# Altium PCB PCB_V1.PcbDoc
Units mm, origin at the board's own origin, x right, y up, seen from the top; angles counter-clockwise.
Board outline 76.58 x 99.4 mm, 2 copper layers (Top Layer, Bottom Layer), stack 0.08 mm thick; 14 components, 8 nets, 32 pads, 0 vias.
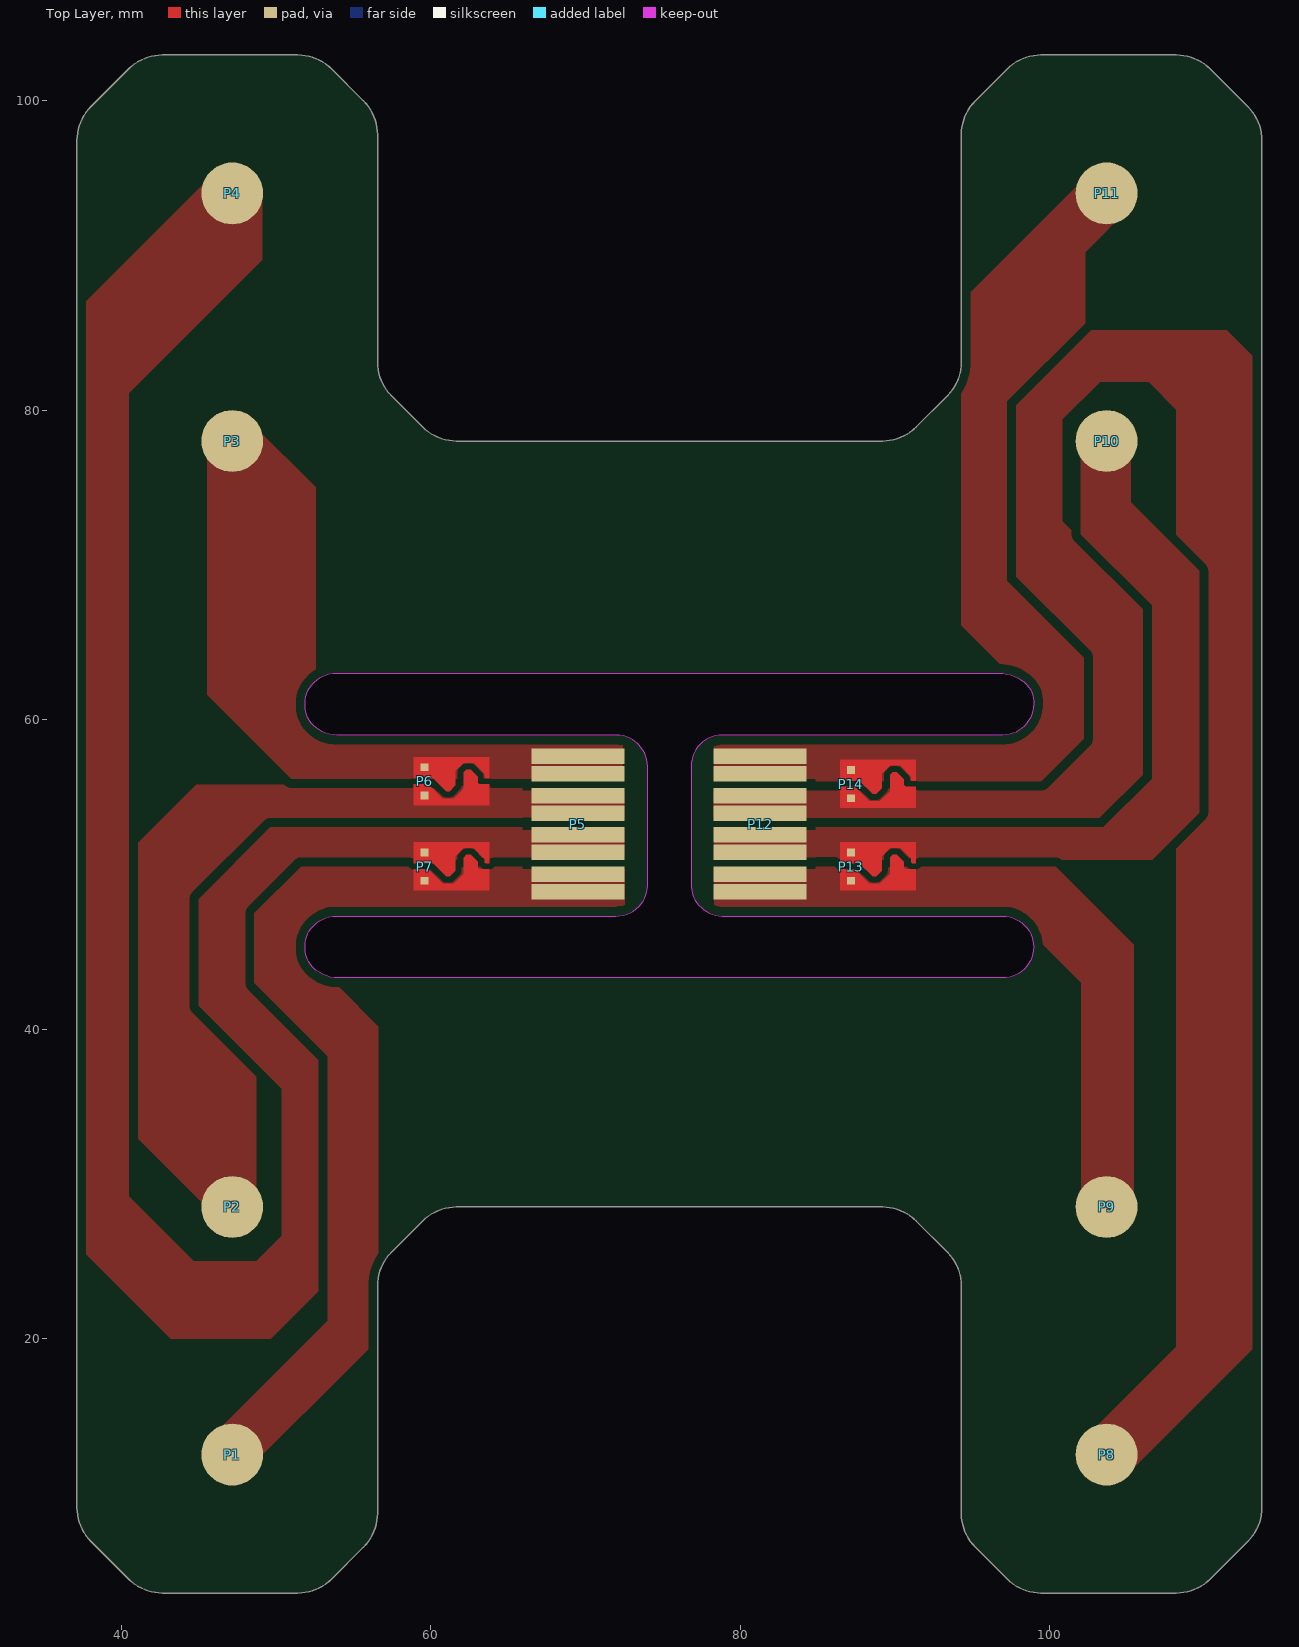
[diagram p0: Top Layer view]
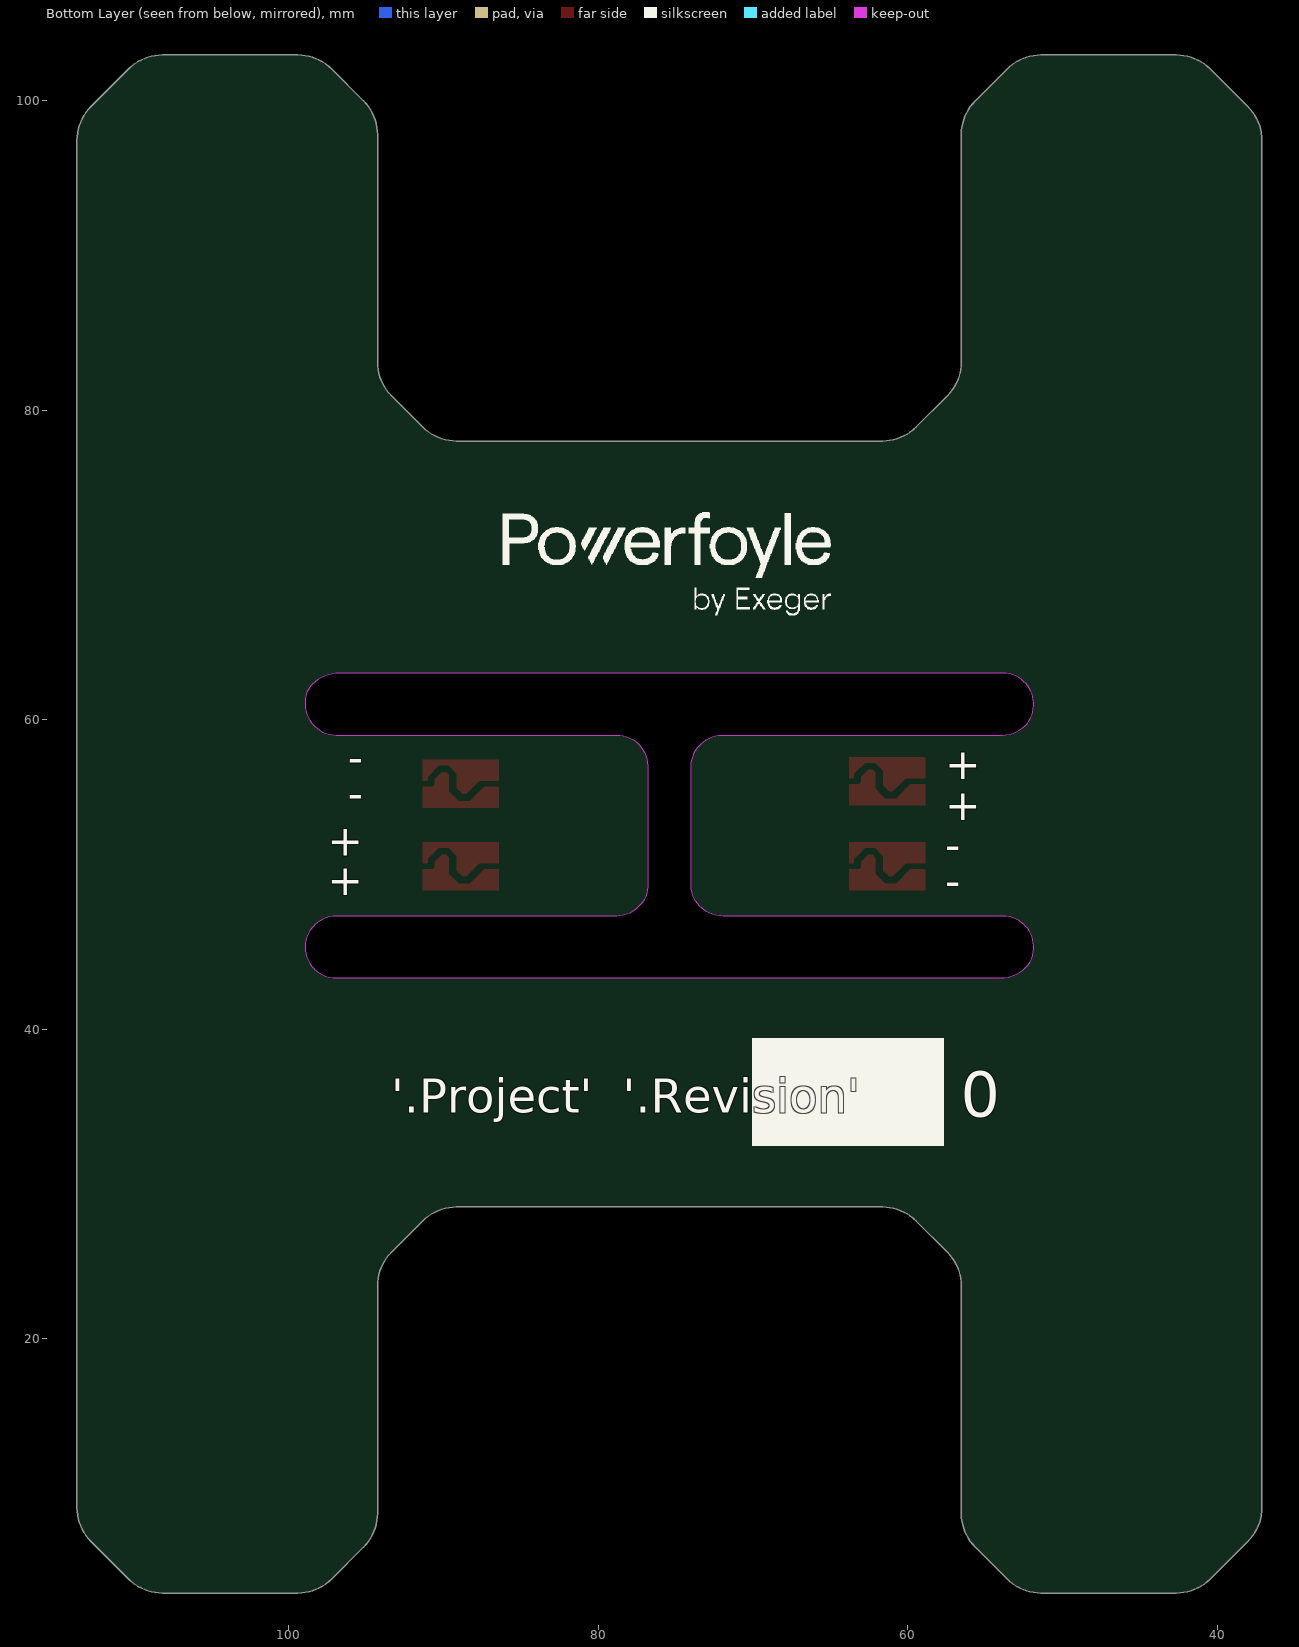
[diagram p1: Bottom Layer view, seen from below]

## Layer stack, top to bottom
Top Solder: solder mask 0.0102, Solder Resist, Dk 3.5
Top Layer: signal copper 0.035
Dielectric 1: dielectric 0.01, Kapton, Dk 4.8
Bottom Layer: signal copper 0.035
Bottom Solder: solder mask 0.0102, Solder Resist, Dk 3.5

## Board outline
40.479,4.448 ccw(c42.647,6.616) 42.647,3.55 51.405,3.55 ccw(c51.405,6.616) 53.573,4.448 55.652,6.527 ccw(c53.484,8.695) 56.55,8.695 56.55,23.405 cw(c59.616,23.405) 57.448,25.573 59.477,27.602 cw(c61.645,25.434) 61.645,28.5 89.183,28.5 cw(c89.183,25.434) 91.351,27.602 93.38,25.573 cw(c91.212,23.405) 94.278,23.405 94.278,8.695 ccw(c97.344,8.695) 95.176,6.527 97.255,4.448 ccw(c99.423,6.616) 99.423,3.55 108.181,3.55 ccw(c108.181,6.616) 110.349,4.448 112.805,6.904 ccw(c110.637,9.072) 113.703,9.072 113.703,97.428 ccw(c110.637,97.428) 112.805,99.596 110.349,102.052 ccw(c108.181,99.884) 108.181,102.95 99.423,102.95 ccw(c99.423,99.884) 97.255,102.052 95.176,99.973 ccw(c97.344,97.805) 94.278,97.805 94.278,83.095 cw(c91.212,83.095) 93.38,80.927 91.351,78.898 cw(c89.183,81.066) 89.183,78 61.645,78 cw(c61.645,81.066) 59.477,78.898 57.448,80.927 cw(c59.616,83.095) 56.55,83.095 56.55,97.805 ccw(c53.484,97.805) 55.652,99.973 53.573,102.052 ccw(c51.405,99.884) 51.405,102.95 42.647,102.95 ccw(c42.647,99.884) 40.479,102.052 38.023,99.596 ccw(c40.191,97.428) 37.125,97.428 37.125,9.072 ccw(c40.191,9.072) 38.023,6.904
cut-out: 75.414,62.989 96.728,62.989 cw(c96.728,60.466) 98.512,62.25 cw(c97.448,61.186) 98.953,61.186 98.953,60.998 cw(c96.973,60.998) 98.373,59.598 98.35,59.575 cw(c96.956,60.969) 96.956,58.998 78.843,58.998 ccw(c78.843,56.957) 77.4,58.4 ccw(c78.782,57.018) 76.828,57.018 76.828,49.201 ccw(c78.526,49.201) 77.325,48 77.458,47.867 ccw(c78.828,49.238) 78.828,47.3 96.969,47.3 cw(c96.969,45.377) 98.328,46.737 98.378,46.687 cw(c96.991,45.3) 98.953,45.3 cw(c96.953,45.3) 98.367,43.886 98.36,43.879 cw(c96.962,45.277) 96.962,43.3 54.021,43.3 cw(c54.021,45.634) 52.371,43.984 cw(c53.568,45.181) 51.875,45.181 51.875,45.376 cw(c53.685,45.376) 52.405,46.656 52.465,46.716 cw(c53.875,45.306) 53.875,47.3 71.941,47.3 ccw(c71.941,49.434) 73.45,47.925 ccw(c72.122,49.253) 74,49.253 74,56.987 ccw(c72.037,56.987) 73.425,58.375 73.37,58.43 ccw(c72,57.061) 72,58.998 53.915,58.998 cw(c53.915,61.14) 52.4,59.625 cw(c53.667,60.892) 51.875,60.892 51.875,61.074 cw(c53.671,61.074) 52.401,62.344 52.475,62.418 cw(c53.875,61.018) 53.875,62.998

## Design rules (kind name [scope] priority, off if disabled: settings)
BoardOutlineClearance [All] p1: gap=0.6 ignorepadtopadclearanceinfootprint=FALSE
Clearance "Clearance to footprint" [HasFootprint('Customer_2022_solder_short_ISOL_0.4_S') OR HasFootprint('Customer_2026_solder_short_ISOL_0.4') OR HasFootprint('EXEGER_IV_10_PIN_ISOL_0.4')] p1: gap=0.4 ignorepadtopadclearanceinfootprint=FALSE
Clearance "Clearance to cell connections" [HasFootprint('Cell_pad_4mm_SM0.5mm')] p2: gap=0.6 ignorepadtopadclearanceinfootprint=FALSE
Clearance [All] p3: gap=0.6 ignorepadtopadclearanceinfootprint=FALSE
DiffPairsRouting [All] p1: maxlimit=0.254 minlimit=0.254 mostfreqgap=0.254 substack1={AC398A8C-2EBD-4929-A576-1C4F7B57599D} toplayer_{ac398a8c-2ebd-4929-a576-1c4f7b57599d}_minwidth=0.381 toplayer_{ac398a8c-2ebd-4929-a576-1c4f7b57599d}_maxwidth=0.381 toplayer_{ac398a8c-2ebd-4929-a576-1c4f7b57599d}_prefwidth=0.381 bottomlayer_{ac398a8c-2ebd-4929-a576-1c4f7b57599d}_minwidth=0.381 bottomlayer_{ac398a8c-2ebd-4929-a576-1c4f7b57599d}_maxwidth=0.381 bottomlayer_{ac398a8c-2ebd-4929-a576-1c4f7b57599d}_prefwidth=0.381 substack2={C3FBE846-BD83-49AA-845B-1BEE8A776ADA} toplayer_{c3fbe846-bd83-49aa-845b-1bee8a776ada}_minwidth=0.381 toplayer_{c3fbe846-bd83-49aa-845b-1bee8a776ada}_maxwidth=0.381 toplayer_{c3fbe846-bd83-49aa-845b-1bee8a776ada}_prefwidth=0.381 bottomlayer_{c3fbe846-bd83-49aa-845b-1bee8a776ada}_minwidth=0.381 bottomlayer_{c3fbe846-bd83-49aa-845b-1bee8a776ada}_maxwidth=0.381 bottomlayer_{c3fbe846-bd83-49aa-845b-1bee8a776ada}_prefwidth=0.381 substack3={068A34C2-B61F-40AE-8550-B44704E20CBD} toplayer_{068a34c2-b61f-40ae-8550-b44704e20cbd}_minwidth=0.381 toplayer_{068a34c2-b61f-40ae-8550-b44704e20cbd}_maxwidth=0.381 toplayer_{068a34c2-b61f-40ae-8550-b44704e20cbd}_prefwidth=0.381 bottomlayer_{068a34c2-b61f-40ae-8550-b44704e20cbd}_minwidth=0.381 bottomlayer_{068a34c2-b61f-40ae-8550-b44704e20cbd}_maxwidth=0.381 bottomlayer_{068a34c2-b61f-40ae-8550-b44704e20cbd}_prefwidth=0.381 toplayer_minwidth=0.381 toplayer_maxwidth=0.381 toplayer_prefwidth=0.381 bottomlayer_minwidth=0.381 bottomlayer_maxwidth=0.381 bottomlayer_prefwidth=0.381 substack4={1DBF04A3-A739-4845-80F4-67AE6DF34821} toplayer_{1dbf04a3-a739-4845-80f4-67ae6df34821}_minwidth=0.381 toplayer_{1dbf04a3-a739-4845-80f4-67ae6df34821}_maxwidth=0.381 toplayer_{1dbf04a3-a739-4845-80f4-67ae6df34821}_prefwidth=0.381 bottomlayer_{1dbf04a3-a739-4845-80f4-67ae6df34821}_minwidth=0.381 bottomlayer_{1dbf04a3-a739-4845-80f4-67ae6df34821}_maxwidth=0.381 bottomlayer_{1dbf04a3-a739-4845-80f4-67ae6df34821}_prefwidth=0.381 substack5={706D0DFD-092C-4A59-9570-597311E816E1} toplayer_{706d0dfd-092c-4a59-9570-597311e816e1}_minwidth=0.381 toplayer_{706d0dfd-092c-4a59-9570-597311e816e1}_maxwidth=0.381 toplayer_{706d0dfd-092c-4a59-9570-597311e816e1}_prefwidth=0.381 bottomlayer_{706d0dfd-092c-4a59-9570-597311e816e1}_minwidth=0.381 bottomlayer_{706d0dfd-092c-4a59-9570-597311e816e1}_maxwidth=0.381 bottomlayer_{706d0dfd-092c-4a59-9570-597311e816e1}_prefwidth=0.381 substack6={F6441547-04AD-42D8-8F2E-114EB13474D3} toplayer_{f6441547-04ad-42d8-8f2e-114eb13474d3}_minwidth=0.381 toplayer_{f6441547-04ad-42d8-8f2e-114eb13474d3}_maxwidth=0.381 toplayer_{f6441547-04ad-42d8-8f2e-114eb13474d3}_prefwidth=0.381 bottomlayer_{f6441547-04ad-42d8-8f2e-114eb13474d3}_minwidth=0.381 bottomlayer_{f6441547-04ad-42d8-8f2e-114eb13474d3}_maxwidth=0.381 bottomlayer_{f6441547-04ad-42d8-8f2e-114eb13474d3}_prefwidth=0.381 substack7={D3D7B19F-2A18-4F5B-8A84-D7E783B0B577} toplayer_{d3d7b19f-2a18-4f5b-8a84-d7e783b0b577}_minwidth=0.381 toplayer_{d3d7b19f-2a18-4f5b-8a84-d7e783b0b577}_maxwidth=0.381 toplayer_{d3d7b19f-2a18-4f5b-8a84-d7e783b0b577}_prefwidth=0.381 bottomlayer_{d3d7b19f-2a18-4f5b-8a84-d7e783b0b577}_minwidth=0.381 bottomlayer_{d3d7b19f-2a18-4f5b-8a84-d7e783b0b577}_maxwidth=0.381 bottomlayer_{d3d7b19f-2a18-4f5b-8a84-d7e783b0b577}_prefwidth=0.381 substack8={33F0C8AE-5BAA-4F54-8420-C15B5188DF2B} toplayer_{33f0c8ae-5baa-4f54-8420-c15b5188df2b}_minwidth=0.381 toplayer_{33f0c8ae-5baa-4f54-8420-c15b5188df2b}_maxwidth=0.381 toplayer_{33f0c8ae-5baa-4f54-8420-c15b5188df2b}_prefwidth=0.381 bottomlayer_{33f0c8ae-5baa-4f54-8420-c15b5188df2b}_minwidth=0.381 bottomlayer_{33f0c8ae-5baa-4f54-8420-c15b5188df2b}_maxwidth=0.381 bottomlayer_{33f0c8ae-5baa-4f54-8420-c15b5188df2b}_prefwidth=0.381 substack9={5DEA7FFC-9C65-4E3C-AA6C-196D072506BA} toplayer_{5dea7ffc-9c65-4e3c-aa6c-196d072506ba}_minwidth=0.381 toplayer_{5dea7ffc-9c65-4e3c-aa6c-196d072506ba}_maxwidth=0.381 toplayer_{5dea7ffc-9c65-4e3c-aa6c-196d072506ba}_prefwidth=0.381 bottomlayer_{5dea7ffc-9c65-4e3c-aa6c-196d072506ba}_minwidth=0.381 bottomlayer_{5dea7ffc-9c65-4e3c-aa6c-196d072506ba}_maxwidth=0.381 bottomlayer_{5dea7ffc-9c65-4e3c-aa6c-196d072506ba}_prefwidth=0.381 maxuncoupledlength=12.7
PolygonConnect [All] p1: connectstyle=Direct reliefconductorwidth=0.254 reliefentries=4 polygonreliefangle="90 Angle" airgapwidth=0.254
RoutingVias [All] p1: holewidth=0.711 width=1.27 viastyle="Through Hole" minholewidth=0.711 minwidth=1.27 maxholewidth=0.711 maxwidth=1.27
SolderMaskExpansion [All] p1: expansion=0.102 istentingtop=FALSE
UnRoutedNet [All] p1: checkbadconnections=TRUE
Width [All] p1: maxlimit=10 minlimit=0.2 preferedwidth=2 substack1={AC398A8C-2EBD-4929-A576-1C4F7B57599D} substack2={C3FBE846-BD83-49AA-845B-1BEE8A776ADA} substack3={068A34C2-B61F-40AE-8550-B44704E20CBD} substack4={1DBF04A3-A739-4845-80F4-67AE6DF34821} substack5={706D0DFD-092C-4A59-9570-597311E816E1} substack6={F6441547-04AD-42D8-8F2E-114EB13474D3} substack7={D3D7B19F-2A18-4F5B-8A84-D7E783B0B577} substack8={33F0C8AE-5BAA-4F54-8420-C15B5188DF2B} substack9={5DEA7FFC-9C65-4E3C-AA6C-196D072506BA}
28 further rules are at their usual default settings.

## Components (designator, comment, footprint, x,y, rotation, side; value= is the part's Value field where it differs from the comment)
P1 "Cell connection" Cell_pad_4mm_SM0.5mm#1 47.164,12.5 r90 top
P2 "Cell connection" Cell_pad_4mm_SM0.5mm#1 47.164,28.5 r90 top
P3 "Cell connection" Cell_pad_4mm_SM0.5mm#1 47.164,78 r90 top
P4 "Cell connection" Cell_pad_4mm_SM0.5mm#1 47.164,94 r90 top
P5 "Exeger IV-test" EXEGER_IV_8_PIN_NO_STIFF_ISOL_0.4 69.498,57.694 r0 top
P6 "Customer conn, solder short" Customer_2022_solder_short_ISOL_0.4_S 60.886,56.188 r0 top
P7 "Customer conn, solder short" Customer_2022_solder_short_ISOL_0.4_S 60.886,50.685 r0 top
P8 "Cell connection" Cell_pad_4mm_SM0.5mm#1 103.664,12.5 r0 top
P9 "Cell connection" Cell_pad_4mm_SM0.5mm#1 103.664,28.5 r0 top
P10 "Cell connection" Cell_pad_4mm_SM0.5mm#1 103.664,78 r0 top
P11 "Cell connection" Cell_pad_4mm_SM0.5mm#2 103.664,94 r0 top
P12 "Exeger IV-test" EXEGER_IV_8_PIN_NO_STIFF_ISOL_0.4 81.275,48.804 r180 top
P13 "Customer conn, solder short" Customer_2022_solder_short_ISOL_0.4_S 88.444,50.69 r0 top
P14 "Customer conn, solder short" Customer_2022_solder_short_ISOL_0.4_S 88.444,56.017 r0 top

## Footprints (in the part's own frame and the unit in brackets; to place one, negate y for a bottom-side part, rotate by r counter-clockwise, add the part's x,y. Pads: shape width x height; smd on the part's side, far side on the other; paste and mask are expansions set on the pad)
Cell_pad_4mm_SM0.5mm#1 [mm]
  round 4 smd mask+0: 1(0,0)
Cell_pad_4mm_SM0.5mm#2 [mm]
  round 4 smd: 1(0,0)
Customer_2022_solder_short_ISOL_0.4_S [mm]
  rect 0.5x0.5 smd paste-2 mask+0: 1(-1.3,0.725) 2(-1.3,-1.1)
  Top Layer region: 0.7,0.488 1.237,1.025 1.875,1.025 2.6,0.3 2.6,0.075 2.65,0.025 2.9,0.025 2.9,1.375 0.7,1.375 -2,1.375 -2,0.4 -1.912,0.488
  Top Layer region: -2,-1.725 2.125,-1.725 2.125,0.125 1.675,0.575 1.4,0.575 1.225,0.4 1.225,-0.65 0.575,-1.3 -0.125,-1.3 -1.05,-0.375 -2,-0.375
  Top Layer region: 1.875,0 2.25,-0.375 2.9,-0.375 2.9,-1.721 2.125,-1.725 1.138,-0.737
  Top Layer region: -2,1.375 0.7,1.375 0.7,-0.45 0.325,-0.825 0.1,-0.825 -0.75,0.025 -2,0.025
EXEGER_IV_8_PIN_NO_STIFF_ISOL_0.4 [mm] "TE  4-487576-9 mating"
  rect 6x1 smd paste-2 mask+0.1: 1(0,-0.066) 2(0,-1.204) 3(0,-2.606) 4(0,-3.744) 5(0,-5.146) 6(0,-6.284) 7(0,-7.686) 8(0,-8.824)

## Part data
P1 P2 P3 P4 P8 P9 P10 P11: library part "Cell connection 1P"
P5 P12: library part "Header 8", "Header, 8-Pin"
P6 P7 P13 P14: library part "Header 2", "Header, 2-Pin"

## Nets (pads, with @x,y where several pads share a name; then routed paths per layer and width w, separated by ;. In a path a pad name is that pad's centre, name@x,y a point inside that pad or via, vN(x,y) a via of type N, cw(c..) or ccw(c..) an arc to the next point about the centre after c; other vN are vias at no path point)
N_1: P1.1 P5.7 P5.8 P7.2
N_2: P4.1 P5.5 P5.6 P7.1
N_3: P8.1 P12.5 P12.6 P14.2
N_4: P11.1 P12.7 P12.8 P14.1
P_1: P2.1 P5.3 P5.4 P6.2
P_2: P3.1 P5.1 P5.2 P6.1
P_3: P9.1 P12.1 P12.2 P13.2
P_4: P10.1 P12.3 P12.4 P13.1

## Polygon pours and split planes (outlines as drawn)
P_1 on Top Layer "NONET_L-01_P-001" (solid, pour order 12): 47.164,26.84 41.05,32.953 41.05,51.988 44.85,55.788 72.349,55.788 72.489,55.648 72.489,53.45 50.036,53.45 44.85,48.264 44.85,40.864 48.704,37.009 48.704,27.602
N_2 on Top Layer "NONET_L-01_P-001" (solid, pour order 11): 46.3,95.6 35.625,84.925 35.625,27.55 43.2,19.975 49.653,19.975 53.293,23.615 53.293,37.811 48.6,42.504 48.6,47.472 51.838,50.71 72.507,50.71 72.507,53.036 49.622,53.036 44.985,48.399 44.985,41.515 50.35,36.15 50.35,26.65 48.704,25.004 44.671,25.004 40.479,29.196 40.479,81.079 49.1,89.7 49.1,94
P_2 on Top Layer "NONET_L-01_P-001" (solid, pour order 10): 45.55,78.85 45.55,70.778 45.55,61.608 50.97,56.188 72.026,56.188 72.411,56.574 72.411,59.393 69.318,62.487 52.544,62.487 52.544,75.006 48.5,79.05
N_1 on Top Layer "NONET_L-01_P-001" (solid, pour order 9): 47.625,11 56.6,19.975 56.6,40.158 51.908,44.851 52.786,45.73 72.526,45.73 72.526,50.464 72.488,50.503 51.631,50.503 48.6,47.472 48.6,42.975 53.34,38.235 53.34,21.14 45.4,13.2
N_3 on Top Layer "N_3_L01_P008" (solid, pour order 8): 102.025,12.5 102.025,13.325 108.181,19.481 108.181,80.031 106.384,81.827 103.243,81.827 100.806,79.391 100.806,72.813 106.484,67.135 106.484,56.526 103.424,53.466 78.277,53.466 78.277,55.571 78.262,55.585 99.683,55.585 102.673,58.576 102.673,64.08 97.419,69.334 97.419,80.51 102.065,85.155 111.439,85.155 114.646,81.949 114.646,20.871 104.6,10.825 103.65,11.775 102.65,11.775
P_4 on Top Layer "P_4_L01_P007" (solid, pour order 7): 101.985,78.564 101.985,71.986 106.6,67.372 106.6,56.186 103.455,53.041 78.305,53.041 78.305,50.965 78.287,50.947 106.622,50.947 109.65,53.975 109.65,69.615 105.229,74.036 105.229,78.683
N_4 on Top Layer "N_4_L01_P006" (solid, pour order 6): 102.525,95.25 94.278,87.003 94.278,66.078 97.464,62.892 95.758,61.186 80.527,61.186 78.251,58.91 78.296,58.864 78.296,56.017 99.458,56.017 102.198,58.757 102.198,64.002 97.22,68.98 97.22,80.57 102.275,85.625 102.275,90.2 105.4,93.325
P_3 on Top Layer "P_3_L01_P005" (solid, pour order 5): 102.025,28.425 102.025,42.988 98.037,46.976 97.957,46.896 78.314,46.896 78.314,50.449 78.277,50.486 100.394,50.486 105.432,45.448 105.432,28.375 104.572,27.515 103.38,27.515
no net on PSA "NONET_L-01_P-001" (solid): 51.623,102.95 cw(c51.623,100.41) 53.419,102.206 55.806,99.819 cw(c54.01,98.023) 56.55,98.023 56.55,82.877 ccw(c59.09,82.877) 57.294,81.081 59.631,78.744 ccw(c61.427,80.54) 61.427,78 89.4,78 ccw(c89.4,80.54) 91.197,78.744 93.534,81.081 ccw(c91.738,82.877) 94.278,82.877 94.278,98.023 cw(c96.818,98.023) 95.022,99.819 97.409,102.206 cw(c99.205,100.41) 99.205,102.95 108.398,102.95 cw(c108.398,100.41) 110.195,102.206 112.959,99.442 cw(c111.163,97.646) 113.703,97.646 113.703,8.854 cw(c111.163,8.854) 112.959,7.058 110.195,4.294 cw(c108.398,6.09) 108.398,3.55 99.205,3.55 cw(c99.205,6.09) 97.409,4.294 95.022,6.681 cw(c96.818,8.477) 94.278,8.477 94.278,23.623 ccw(c91.738,23.623) 93.534,25.419 91.197,27.756 ccw(c89.4,25.96) 89.4,28.5 61.427,28.5 ccw(c61.427,25.96) 59.631,27.756 57.294,25.419 ccw(c59.09,23.623) 56.55,23.623 56.55,8.477 cw(c54.01,8.477) 55.806,6.681 53.419,4.294 cw(c51.623,6.09) 51.623,3.55 42.429,3.55 cw(c42.429,6.09) 40.633,4.294 37.869,7.058 cw(c39.665,8.854) 37.125,8.854 37.125,97.646 cw(c39.665,97.646) 37.869,99.442 40.633,102.206 cw(c42.429,100.41) 42.429,102.95

## Silkscreen, mask and mechanical layers (free items; w line width, h text height)
Bottom Overlay:
  drawing of 21 lines, arcs and shapes, not listed
  text "-" at 95.2,58.072 h2 r180
  text "+" at 57.583,56.135 h2
  text "-" at 95.2,55.747 h2 r180
  text "+" at 57.583,53.495 h2
  text "+" at 95.2,52.897 h2 r180
  text "-" at 57.583,50.91 h2
  text "+" at 95.2,50.347 h2 r180
  text "-" at 57.583,48.585 h2
  text "'.Project'  '.Revision'" at 93.38,34.6 h2.2
  text "0" at 56.6,33.35 h5
Cell drawing:
  circle w0.013: c103.664,94 r6
  circle w0.013: c47.164,78 r6
  circle w0.013: c47.164,28.5 r6
  circle w0.013: c103.664,28.5 r6
  circle w0.013: c103.664,78 r6
  circle w0.013: c103.664,12.5 r6
  circle w0.013: c47.164,12.5 r6
  circle w0.013: c47.164,94 r6
  circle w0.013: c103.664,94 r6.5
  circle w0.013: c103.664,12.5 r6.5
  circle w0.013: c47.164,94 r6.5
  circle w0.013: c47.164,12.5 r6.5
  circle w0.013: c103.664,94 r7.5
  circle w0.013: c103.664,12.5 r7.5
  circle w0.013: c47.164,94 r7.5
  circle w0.013: c47.164,12.5 r7.5
  lines w0.013: 18.914,-11.25 ccw(c19.914,-11.25) 19.914,-12.25 130.914,-12.25 ccw(c130.914,-11.25) 131.914,-11.25 131.914,117.75 ccw(c130.914,117.75) 130.914,118.75 19.914,118.75 ccw(c19.914,117.75) 18.914,117.75 18.914,-11.25
  lines w0.1: 9.1,118.75 24.75,118.75 ; 13.625,53.25 66.414,53.25 97.6,53.25 145.35,53.25 ; 16.375,-12.25 21.975,-12.25 ; 18.914,-16.85 18.914,-1.85 ; 18.914,115.725 18.914,122.961 ; 46.266,126.334 cw(c44.098,124.166) 47.164,124.166 47.164,94 ; 74,44.4 74,57.4 75.414,57.4 ; 75.414,-20.986 75.414,38.439 75.414,62.25 75.414,132.786 ; 75.414,53.25 75.414,57.4 ; 76.828,45 76.828,57.4 75.414,57.4 ; 127.125,118.75 132.925,118.75 ; 127.725,-12.25 135.9,-12.25 ; 131.914,-20.55 131.914,3.275 ; 131.914,114.975 131.914,122.514
Mech notes:
  rectangle: 203.1,7.25 230.1,17.75
PSA:
  pour cut-out: 99.27,94.247 99.27,96.325 cw(c101.81,96.325) 101.81,98.865 105.485,98.865 cw(c105.485,96.325) 108.025,96.325 108.025,91.626 cw(c105.485,91.626) 105.485,89.086 101.807,89.086 cw(c101.807,91.626) 99.267,91.626 99.267,94.247
  pour cut-out: 99.27,78.247 99.27,80.325 cw(c101.81,80.325) 101.81,82.865 105.485,82.865 cw(c105.485,80.325) 108.025,80.325 108.025,75.626 cw(c105.485,75.626) 105.485,73.086 101.807,73.086 cw(c101.807,75.626) 99.267,75.626 99.267,78.247
  pour cut-out: 99.27,28.747 99.27,30.825 cw(c101.81,30.825) 101.81,33.365 105.485,33.365 cw(c105.485,30.825) 108.025,30.825 108.025,26.126 cw(c105.485,26.126) 105.485,23.586 101.807,23.586 cw(c101.807,26.126) 99.267,26.126 99.267,28.747
  pour cut-out: 99.27,12.747 99.27,14.825 cw(c101.81,14.825) 101.81,17.365 105.485,17.365 cw(c105.485,14.825) 108.025,14.825 108.025,10.126 cw(c105.485,10.126) 105.485,7.586 101.807,7.586 cw(c101.807,10.126) 99.267,10.126 99.267,12.747
  pour cut-out: 42.77,12.747 42.77,14.825 cw(c45.31,14.825) 45.31,17.365 48.985,17.365 cw(c48.985,14.825) 51.525,14.825 51.525,10.126 cw(c48.985,10.126) 48.985,7.586 45.307,7.586 cw(c45.307,10.126) 42.767,10.126 42.767,12.747
  pour cut-out: 42.77,28.747 42.77,30.825 cw(c45.31,30.825) 45.31,33.365 48.985,33.365 cw(c48.985,30.825) 51.525,30.825 51.525,26.126 cw(c48.985,26.126) 48.985,23.586 45.307,23.586 cw(c45.307,26.126) 42.767,26.126 42.767,28.747
  pour cut-out: 42.77,78.247 42.77,80.325 cw(c45.31,80.325) 45.31,82.865 48.985,82.865 cw(c48.985,80.325) 51.525,80.325 51.525,75.626 cw(c48.985,75.626) 48.985,73.086 45.307,73.086 cw(c45.307,75.626) 42.767,75.626 42.767,78.247
  pour cut-out: 42.77,94.247 42.77,96.325 cw(c45.31,96.325) 45.31,98.865 48.985,98.865 cw(c48.985,96.325) 51.525,96.325 51.525,91.626 cw(c48.985,91.626) 48.985,89.086 45.307,89.086 cw(c45.307,91.626) 42.767,91.626 42.767,94.247
  pour cut-out: 98.953,60.9 98.953,45.103 51.875,45.103 51.875,60.998
Board Outline:
  lines w0.1: 74,50.125 74,56.375 ; 76.828,50.125 76.828,56.375
  lines w0.2: 53.875,43.3 cw(c53.875,45.3) 51.875,45.3 cw(c53.875,45.3) 53.875,47.3 67,47.3 72,47.3 ccw(c72,49.3) 74,49.3 74,50.125 74,56.375 74,56.998 ccw(c72,56.998) 72,58.998 67,58.998 53.875,58.998 cw(c53.875,60.998) 51.875,60.998 cw(c53.875,60.998) 53.875,62.998 ; 53.875,43.309 67,43.309 72,43.309 ; 53.875,62.989 67,62.989 72,62.989 78.828,62.989 83.828,62.989 96.953,62.989 ; 72,43.3 78.828,43.3 83.828,43.3 96.953,43.3 ccw(c96.953,45.3) 98.953,45.3 ccw(c96.953,45.3) 96.953,47.3 ; 78.828,47.291 83.828,47.291 96.953,47.291 ; 78.828,47.3 cw(c78.828,49.3) 76.828,49.3 76.828,50.125 76.828,56.375 76.828,56.998 cw(c78.828,56.998) 78.828,58.998 83.828,58.998 96.953,58.998 ccw(c96.953,60.998) 98.953,60.998 ccw(c96.953,60.998) 96.953,62.998 ; 37.125,9.072 ccw(c40.191,9.072) 38.023,6.904 40.479,4.448 ccw(c42.647,6.616) 42.647,3.55 43.2,3.55 51.405,3.55 ccw(c51.405,6.616) 53.573,4.448 55.652,6.527 ccw(c53.484,8.695) 56.55,8.695 56.55,23.405 cw(c59.616,23.405) 57.448,25.573 59.477,27.602 cw(c61.645,25.434) 61.645,28.5 75.414,28.5 89.183,28.5 cw(c89.183,25.434) 91.351,27.602 93.38,25.573 cw(c91.212,23.405) 94.278,23.405 94.278,8.695 ccw(c97.344,8.695) 95.176,6.527 97.255,4.448 ccw(c99.423,6.616) 99.423,3.55 107.628,3.55 108.181,3.55 ccw(c108.181,6.616) 110.349,4.448 112.805,6.904 ccw(c110.637,9.072) 113.703,9.072 113.703,53.25 113.703,97.428 ccw(c110.637,97.428) 112.805,99.596 110.349,102.052 ccw(c108.181,99.884) 108.181,102.95 107.628,102.95 99.423,102.95 ccw(c99.423,99.884) 97.255,102.052 95.176,99.973 ccw(c97.344,97.805) 94.278,97.805 94.278,83.095 cw(c91.212,83.095) 93.38,80.927 91.351,78.898 cw(c89.183,81.066) 89.183,78 75.414,78 61.645,78 cw(c61.645,81.066) 59.477,78.898 57.448,80.927 cw(c59.616,83.095) 56.55,83.095 56.55,97.805 ccw(c53.484,97.805) 55.652,99.973 53.573,102.052 ccw(c51.405,99.884) 51.405,102.95 43.2,102.95 42.647,102.95 ccw(c42.647,99.884) 40.479,102.052 38.023,99.596 ccw(c40.191,97.428) 37.125,97.428 37.125,53.25 37.125,9.072